# Altium PCB PanelFK02.PcbDoc
Units mil, origin at the board's own origin, x right, y up, seen from the top; angles counter-clockwise.
Board outline 6000 x 4000 mil, 2 copper layers (Top Layer, Bottom Layer); 22 components, 21 nets, 78 pads, 0 vias.
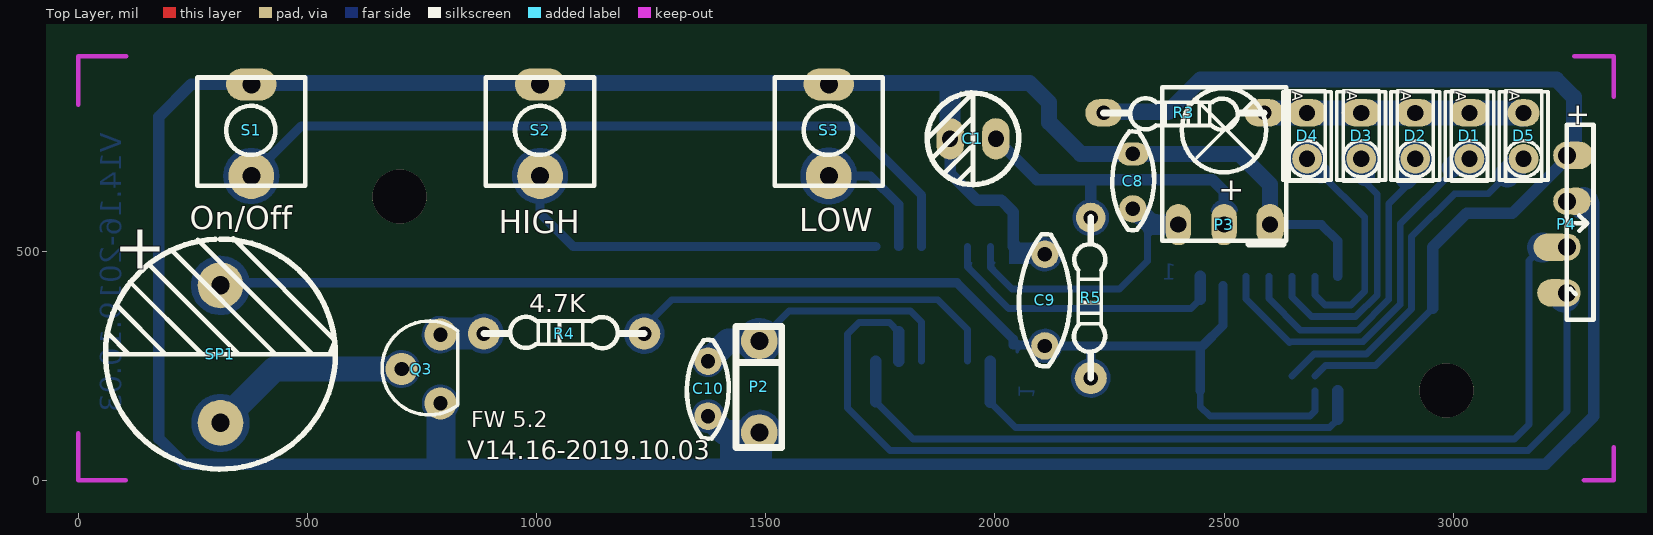
[diagram p0: Top Layer view]
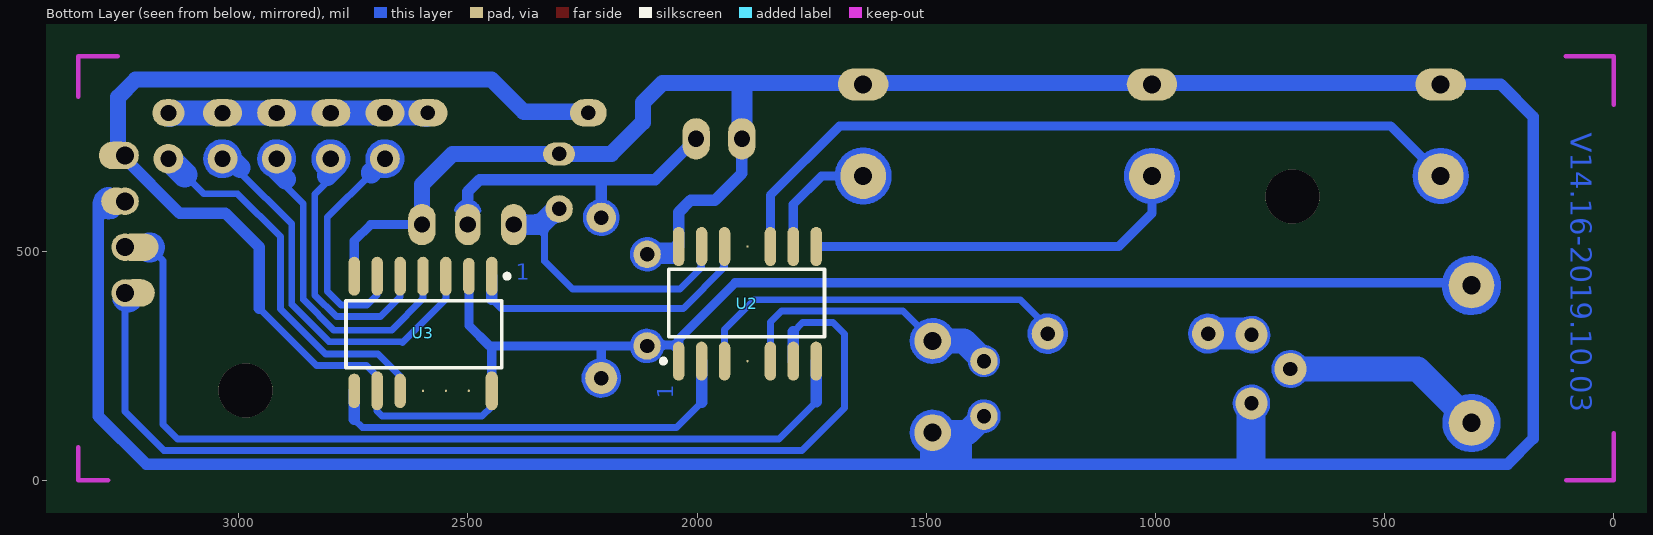
[diagram p1: Bottom Layer view, seen from below]

## Layer stack, top to bottom
Top Solder: solder mask 0.4, Solder Resist, Dk 3.5
Top Layer: signal copper 1.4
Dielectric1: dielectric 12.6, FR-4, Dk 4.8
Bottom Layer: signal copper 1.4
Bottom Solder: solder mask 0.4, Solder Resist, Dk 3.5

## Board outline
-586.82,-718.74 5413.18,-718.74 5413.18,3281.26 -586.82,3281.26

## Design rules (kind name [scope] priority, off if disabled: settings)
Clearance [All] p1: gap=10
FabricationTestPointUsage TestPointUsage [All] p1: valid=0 allowmultiple=FALSE
FabricationTestpoint Testpoint [All] p1: side=3 testpointundercomponent=TRUE minsize=40 maxsize=100 preferedsize=60 minholesize=0 maxholesize=40 preferedholesize=32 testpointgrid=1 allowsidetop=TRUE allowsidebottom=TRUE usegrid=TRUE gridtolerance=0.01
PolygonConnect [All] p1: connectstyle=Relief reliefconductorwidth=10 reliefentries=4 polygonreliefangle="90 Angle" airgapwidth=10
RoutingVias [All] p1: holewidth=28 width=50 viastyle="Through Hole" minholewidth=28 minwidth=50 maxholewidth=28 maxwidth=50
SolderMaskExpansion [All] p1: expansion=4
Width [All] p1: maxlimit=100 minlimit=5 preferedwidth=25 minimp=50.000000 maximp=50.000000 favimp=50.000000
27 further rules are at their usual default settings.

## Classes and differential pairs
component class DDFK: C1 C10 D1 D2 D3 D4 D5 P2 P3 P4 P5 R4 R7 S1 S2 S3 SP1 U2 U3

## Components (designator, comment, footprint, x,y, rotation, side; value= is the part's Value field where it differs from the comment)
C1 "100uF" RB.1/.2 1952,745 r180 top
C8 "100pF" RAD0.12#1 2301,712 r270 top (schematic designator C3)
C9 "100nF" RAD0.2 2109,493 r270 top (schematic designator C3)
C10 "100nF" RAD0.12#2 1374,140 r90 top
D1 "L1" LED0.5Rec#1 3035.12,751.54 r270 top locked
D2 "L2" LED0.5Rec#1 2917.01,751.54 r270 top locked
D3 "L3" LED0.5Rec#1 2798.9,751.54 r270 top locked
D4 "L4" LED0.5Rec#1 2680.79,751.54 r270 top locked
D5 "L5" LED0.5Rec#2 3153.23,751.54 r270 top locked
P2 "Magnet" Magnet 1486,304 r270 top
P3 "IrReceiver" IrRec1 2499.68,763.8 r0 top locked
P4 "Header 4" xH4RALim 3247.72,708.66 r180 top
Q3 "2N3904" TO92BS2 765.4,242.8 r270 top (schematic designator Q2)
R3 "220" RES0.35#1 2237,801.54 r0 top (schematic designator R1)
R4 "4.7K" RES0.35#2 1235,320 r180 top
R5 "10" RES0.35#3 2209,573 r270 top (schematic designator R1)
S1 "On/Off" PUSHBOT2 377.64,763.8 r270 top locked
S2 "HIGH" PUSHBOT2 1007.56,763.8 r270 top locked
S3 "LOW" PUSHBOT2 1637.48,763.8 r270 top locked
SP1 "BUZZER" RB.3/.6 310.39,425.2 r90 top
U2 "ATtiny24A-SSU" SOIC14#1 2040,260 r90 bottom
U3 "MC74HC164AN" SOIC14#2 2447.8,445.28 r270 bottom

## Footprints (in the part's own frame and the unit in brackets; to place one, negate y for a bottom-side part, rotate by r counter-clockwise, add the part's x,y. Pads: shape width x height; smd on the part's side, far side on the other; paste and mask are expansions set on the pad)
IrRec1 [mil] "38KHz Ir Receiver"
  oval 55x90 hole 35.43: 1(-99.65,-205.95) 2(0.35,-205.95)
  oval 60x90 hole 35.43: 3(100.35,-205.95)
  silkscreen extent -135,-249 135,94
LED0.5Rec#1 [mil] "Led 0.5mm Rectangular"
  oval 60x85 hole 35.43: 1(-50,0)
  round 65 hole 35.43: 2(50,0)
  silkscreen extent -98,-53 98,53
LED0.5Rec#2 [mil] "Led 0.5mm Rectangular"
  oval 60x70 hole 35.43: 1(-50,0)
  round 65 hole 35.43: 2(50,0)
  silkscreen extent -98,-53 98,53
Magnet [mil]
  round 80 hole 39.37: 1(0,0) 2(200,0)
  silkscreen extent -31,-51 232,49
PUSHBOT2 [mil] "NO-2pin"
  oval 70x110 hole 39.37: 1(-100,0)
  round 100 hole 39.37: 2(100,0)
  silkscreen extent -115,-118 121,118
RAD0.2 [mil]
  round 60 hole 31.5: 1(0,0) 2(200,0)
  silkscreen extent -44,-57 244,55
RAD0.12#1 [mil]
  oval 50x70 hole 31.5: 1(0,0)
  round 60 hole 31.5: 2(120,0)
  silkscreen extent -49,-45 166,46
RAD0.12#2 [mil]
  round 60 hole 31.5: 1(0,0) 2(120,0)
  silkscreen extent -49,-45 166,46
RB.1/.2 [mil]
  oval 60x90 hole 35.43: 1(-50,0) 2(50,0)
  silkscreen extent -100,-100 100,100
RB.3/.6 [mil]
  round 100 hole 40: 1(0,0) 2(-300,0)
  silkscreen extent -401,-251 102,251
RES0.35#1 [mil] "Diode, Axial; Body 5.2 x 2.7 mm (LxDia. max), Lead Dia. 0.86 mm (max)"
  oval 80x60 hole 31.5: 1(0,0)
  oval 85x60 hole 31.5 paste+0: 2(350,0)
  silkscreen extent 0,-37 350,32
RES0.35#2 [mil] "Diode, Axial; Body 5.2 x 2.7 mm (LxDia. max), Lead Dia. 0.86 mm (max)"
  round 70 hole 31.5: 1(0,0)
  round 70 hole 31.5 paste+0: 2(350,0)
  silkscreen extent 0,-37 350,32
RES0.35#3 [mil] "Diode, Axial; Body 5.2 x 2.7 mm (LxDia. max), Lead Dia. 0.86 mm (max)"
  round 65 hole 31.5: 1(0,0)
  round 70 hole 31.5 paste+0: 2(350,0)
  silkscreen extent 0,-37 350,32
SOIC14#1 [mil] "SOIC, 16-Leads, Body 9.9x3.9mm, Pitch 1.27mm, IPC High Density"
  oval 85x25 smd: 1(0,0) 2(0,-50) 3(0,-100) 5(0,-200) 6(0,-250) 7(0,-300) 8(250.04,-300) 9(250.04,-250) 10(250.04,-200) 12(250.04,-100) 13(250.04,-50) 14(250.04,0)
  round 5 smd: 4(0,-150) 11(250.04,-150)
  silkscreen extent -5,-318 200,38, body extent 16,-318 235,20, height 69
SOIC14#2 [mil] "SOIC, 16-Leads, Body 9.9x3.9mm, Pitch 1.27mm, IPC High Density"
  oval 85x25 smd: 1(0,0) 3(0,-100) 4(0,-150) 5(0,-200) 6(0,-250) 7(0,-300) 9(250.04,-250)
  oval 80x25 smd: 2(0,-50)
  oval 75x25 smd: 8(250.04,-300) 10(250.04,-200)
  round 5 smd: 11(250.04,-150) 12(250.04,-100) 13(250.04,-50)
  oval 85x27 smd: 14(250.04,0)
  silkscreen extent -5,-318 200,38, body extent 16,-318 235,20, height 69
TO92BS2 [mil] "NPN-CC5551,C945 Base Side"
  round 70 hole 31.5: 1(-75,25) 2(0,-60) 3(75,25)
  silkscreen extent -105,-102 100,63
xH4RALim [mil] "100mil between pins"
  round 60 hole 39.37: 1(0,0) 2(0,100) 3(0,200) 4(0,300)
  silkscreen extent -58,-67 0,358

## Part data
C1 C10: library part Cap, "Capacitor SMD"
C8: library part Cap, "Capacitor np"
C9: library part Cap, "Capacitor"
D1 D2 D3 D4 D5: library part LED0.5, "LED Radial 0.5"
P2: library part "Header 6", "Header, 6-Pin"
P3: library part "Header 3", "3pin"
P4: library part "Header 5", "Header, 5-Pin"
Q3: library part BC337, "NPN General Purpose Amplifier"
R3 R4 R5: library part Resistor, "Resistor"
S1 S2 S3: library part SW-PB, "Push Botton"
U2: library part ATtiny24-16PC, "8-Bit AVR Microcontroller with 2K Bytes of Flash Memory"
U3: "8-Bit Serial Input / Parallel-Output Shift Register"

## Free pads (board coordinates)
  round 118.11 hole 118.11: 0(2985,196) 1(701,619)
  oval 90x60 all layers, no hole: 2(3220,508.66)
  oval 80x60 all layers, no hole: 2(3223,408.66) 2(3265,708.66)
  oval 65x60 all layers, no hole: 2(3267.23,608.66)

## Nets (pads, with @x,y where several pads share a name; then routed paths per layer and width w, separated by ;. In a path a pad name is that pad's centre, name@x,y a point inside that pad or via, vN(x,y) a via of type N, cw(c..) or ccw(c..) an arc to the next point about the centre after c; other vN are vias at no path point)
+5V: C9.2 P4.1 pad.2@3265,708.66 R3.1 R5.2 SP1.1 U2.1 U3.2 U3.9 U3.14 | length 5694.8
  Bottom Layer w7: 2067.92,288.63 cw(c2068.43,280.07) 2076.22,283.64
  Bottom Layer w8: 2045.97,309.52 ccw(c2054.54,309.56) 2054,301 ; U2.1@2048.48,281.02 cw(c2057.04,280.48) 2058,289 ; 2069,301 ccw(c2069.96,309.52) 2077.95,306.41
  Bottom Layer w15: U3.14 2447.8,161.2 2468.76,140.24 2687.24,140.24 2697.8,150.8 U3.9 ; U3.9@2697.8,227.28 2720.8,250.28 2830.28,250.28 2955,375
  Bottom Layer w20: SP1.1 SP1.1@316.2,431 ; SP1.1@327.2,442 SP1.1@316.2,431 ; C9.2@2103,293 2207,293 ; C9.2@2103,295 2040,295 2040,308 1917,431 SP1.1@316.2,431 ; R5.2 2209,291 2207,293 ; U3.14 2447.8,293 ; U3.2@2497.8,425.28 2497.8,338 2452.79,293 2207,293 ; 365.2,425.2 ccw(c310.39,425.2) 365.2,425.2 ; C9.2@2136.66,293 ccw(c2109,293) C9.2@2136.66,293 ; R5.2@2241.98,223 ccw(c2209,223) R5.2@2241.98,223
  Bottom Layer w25: 2955,375 2955,509 3028.8,582.8 3128.8,582.8 pad.2@3250.5,704.5
  Bottom Layer w35: R3.1@2237,798 2243,804 2378,804 2448,874 3225,874 3263,836 3263,723.94 P4.1
BUZZER: R4.1 U2.3 | length 1054.9
  Bottom Layer w15: R4.1 1235,334 1295,394 1875,394 1940,329 U2.3
  Bottom Layer w20: R4.1@1269.23,320 ccw(c1235,320) R4.1@1269.23,320
CLK: U2.2 U3.8 | length 940.2
  Bottom Layer w15: 1990,170 2044.76,115.24 2730.24,115.24 2747.8,132.8
  Bottom Layer w25: 1990,170 U2.2 ; 2747.8,132.8 U3.8
DIMOUT: P4.3 pad.2@3220,508.66 U2.7 | length 2048.9
  Bottom Layer w15: 1740,171 1820.76,90.24 3133.24,90.24 3165,122 3165,479 pad.2@3188,502
  Bottom Layer w20: pad.2@3198.12,530.65 ccw(c3194,508) pad.2@3201.87,486.36
  Bottom Layer w25: 1740,171 U2.7 ; pad.2@3237.62,508 pad.2@3247.72,497.91
GND: C1.2 C8.1 C9.1 C10.1 P2.2 P3.3 P4.2 pad.2@3267.23,608.66 Q3.3 S1.1 S2.1 S3.1 U2.14 U3.7 | length 8836.6
  Bottom Layer w5: U2.14@2050,524 ccw(c2057.76,523.23) 2061.36,516.32 ; 3292.16,572.72 cw(c3291.02,567.87) 3296,568
  Bottom Layer w20: P3.3 2712.15,557.85 2747.8,522.2 U3.7 ; pad.2@3271.02,582.22 ccw(c3282.59,604.69) pad.2@3281.82,629.96 ; C10.1@1400.68,140 ccw(c1374,140) C10.1@1400.68,140 ; 1526,104 ccw(c1486,104) 1526,104 ; C9.1@2136.46,493 ccw(c2109,493) C9.1@2136.46,493
  Bottom Layer w25: S1.1 246.8,863.8 176,793 176,91 231.76,35.24 3201.24,35.24 3306,140 3306,581 pad.2@3278.34,608.66 ; 1900,855 1900,867 ; C1.2 1902,670 1961,611 2014,611 2040,585 U2.14 ; Q3.3@818.8,167.8 ccw(c790.4,167.8) Q3.3@818.8,167.8
  Bottom Layer w35: S1.1 380.84,867 1900,867 2075,867 2118,824 2118,781 2187,712 C8.1 2533,712 2600.04,644.96 P3.3 ; pad.2@3267.23,608.66 P4.2 pad.2@3278.34,608.66
  Bottom Layer w45: 1900,855 1902,853 C1.2
  Bottom Layer w55: C10.1 1410,104 P2.2 1486,53
IRSEN: C8.2 P3.1 U2.13 | length 696
  Bottom Layer w5: U2.13@1998.82,475.2 ccw(c2004.83,469.08) 1999.38,462.46 ; C8.2@2302,564 cw(c2302.95,555.48) 2309.31,561.23 ; 2322,549 cw(c2307.76,533.88) 2328.39,536.27 ; 2346.58,580.76 ccw(c2352.94,586.51) 2353.89,577.99
  Bottom Layer w8: 2336.49,532.06 cw(c2345,531) 2343.94,539.51 ; 2368.48,576.02 ccw(c2369.44,584.54) P3.1@2378,584 ; 2370.26,539.34 cw(c2369.72,530.78) P3.1@2378,533
  Bottom Layer w15: U2.13 1990,464 2037,417 2272,417 2333,478 2333,550 ; C8.2@2305,592 C8.2@2307,592
  Bottom Layer w45: C8.2@2307,592 2341.15,557.85 P3.1
KEY1: S1.2 U2.10 | length 2005.1
  Bottom Layer w20: S1.2 486.84,773 1689,773 1840,622 U2.10 ; 429.05,663.8 ccw(c377.64,663.8) 429.05,663.8
KEY2: S2.2 U2.8 | length 1166.3
  Bottom Layer w20: S2.2 1007.56,582.44 1080,510 U2.8@1740,510 ; 1058.88,663.8 ccw(c1007.56,663.8) 1058.88,663.8
KEY3: S3.2 U2.9 | length 598.1
  Bottom Layer w20: S3.2 1728.2,663.8 1790,602 U2.9 ; 1689.69,663.8 ccw(c1637.48,663.8) 1689.69,663.8
MAGNET: C10.2 P2.1 U2.5 | length 1015.3
  Bottom Layer w15: P2.1 1551,369 1816,369 1840,345 U2.5
  Bottom Layer w20: C10.2@1399.08,260 ccw(c1374,260) C10.2@1399.08,260 ; 1526.05,304 ccw(c1486,304) 1526.05,304
  Bottom Layer w55: C10.2 1418,304 P2.1
NetD1_1: D1.1 D2.1 D3.1 D4.1 D5.1 R3.2 | length 574.2
  Bottom Layer w55: R3.2@2590.53,798 R3.2 3146.16,801.54 3149.69,798 D5.1
NetD1_2: D1.2 U3.3 | length 1039.9
  Bottom Layer w15: U3.3 2547.8,395.28 2642.8,300.28 2644.8,302.28 2802.49,302.28 2884,383.78 2884,558.78 2996.5,671.28 2996.5,681.5
  Bottom Layer w25: D1.2@3065.12,701.54 ccw(c3035.12,701.54) D1.2@3065.12,701.54
  Bottom Layer w45: 2996.5,681.5 3016.54,701.54 D1.2
NetD2_2: D2.2 U3.4 | length 873.1
  Bottom Layer w15: U3.4 2597.8,396.28 2666.8,327.28 2792.14,327.28 2859,394.14 2859,603 2898,642
  Bottom Layer w25: D2.2@2947.01,701.54 ccw(c2917.01,701.54) D2.2@2947.01,701.54
  Bottom Layer w45: 2897,657 D2.2@2935.27,695.27
NetD3_2: D3.2 U3.5 | length 810.6
  Bottom Layer w15: U3.5 2647.8,400.2 2690.72,357.28 2786.78,357.28 2834,404.49 2834,624 2807.5,650.5 2807.5,665.5 ; D3.2@2804.9,707.54 D3.2@2815.72,696.72 ; 2805,649 2818.5,662.5
  Bottom Layer w25: D3.2@2828.9,701.54 ccw(c2798.9,701.54) D3.2@2828.9,701.54
  Bottom Layer w45: D3.2@2787.4,684.6 2807,665 ; D3.2@2798.9,682.1 D3.2
NetD4_2: D4.2 U3.6 | length 701.2
  Bottom Layer w15: U3.6 2697.8,404.28 2719.8,382.28 2776.43,382.28 2806.72,412.57 2806.72,573.28 2710.5,669.5
  Bottom Layer w25: D4.2@2710.79,701.54 ccw(c2680.79,701.54) D4.2@2710.79,701.54
  Bottom Layer w45: D4.2 2710.5,671.82 2710.5,669.5
NetD5_2: D5.2 U3.10 | length 794.8
  Bottom Layer w15: U3.10@2647.8,227.28 2695.8,275.28 2810.85,275.28 2909,373.43 2909,532 3002,625 3076,625 3117.5,666.5
  Bottom Layer w55: 3117.5,666.5 3152.54,701.54 D5.2
NetQ2_1: Q3.1 R4.2 | length 320.3
  Bottom Layer w25: Q3.1@810.58,337.98 ccw(c790.4,317.8) Q3.1@818.94,317.8
  Bottom Layer w35: R4.2@911,320 ccw(c885,320) R4.2@911,320
NetQ2_2: Q3.2 SP1.2 | length 977.9
  Bottom Layer w20: 364.03,125.2 ccw(c310.39,125.2) 364.03,125.2 ; Q3.2@736.79,242.8 ccw(c705.4,242.8) Q3.2@736.79,242.8
  Bottom Layer w55: SP1.2 427.99,242.8 Q3.2
SERDATA: U2.12 U3.1 | length 658.2
  Bottom Layer w5: U2.12@1948,474 ccw(c1955.36,469.6) 1948.09,465.06
  Bottom Layer w15: U2.12 1940,465 2030,375 2428,375 2447.8,394.8
  Bottom Layer w25: 2447.8,394.8 U3.1
VMIC: C1.1 P3.2 R5.1 | length 958.6
  Bottom Layer w10: 2475.45,588.15 cw(c2500.51,582.51) 2525.23,589.47
  Bottom Layer w20: R5.1@2239.15,573 ccw(c2209,573) R5.1@2239.15,573
  Bottom Layer w25: C1.1 2091,656 2210,656 ; R5.1 2209,655 2210,656 ; P3.2 2500.04,629.96 2474,656 2210,656
ZEROC: P4.4 pad.2@3223,408.66 U2.6 | length 2308.4
  Bottom Layer w15: 1790,324 1770,344 1703,344 1678,319 1678,158 1770.76,65.24 3163.24,65.24 3247.72,149.72 P4.4
  Bottom Layer w20: pad.2@3225,383 ccw(c3242.03,400.14) P4.4@3265.42,394.08
  Bottom Layer w25: U2.6 1790,324
pads on no net: U2.4 U2.11 U3.11 U3.12 U3.13

## Keep-outs
Keep-Out Layer:
  lines w10: 0,103 0,0 104,0 ; 0,819 0,925.2 105,925.2 ; 3264,925.2 3350,925.2 3350,837 ; 3285,0 3350,0 3350,72

## Other copper
Bottom Layer:
  rectangle net NetQ2_1: 778.4,285 885,355
  rectangle net GND: 2031,472 2119,519
  rectangle net GND: 760,39 823,158
  rectangle net GND: 1400,36 1486,87
  region net GND: 3318,608 3318,570 3317,570 3306,581
  text "V14.16-2019.10.03" at 109,758 h78.74 r90
  text "1" at 2396,425 h60
  text "1" at 2040,178 h60 r270

## Silkscreen, mask and mechanical layers (free items; w line width, h text height)
Top Overlay:
  circle w10: c2499.68,763.8 r92.01
  lines w8: 2439,831 2564,706 ; 2441,705 2566,830
  text "+" at 3236,824 h80 r270
  text "+" at 2487,611 h50
  text "+" at 78,461 h100
  text "FW 5.2" at 858,104 h60
  text "V14.16-2019.10.03" at 849,32 h70

## Text inside footprints (layer, text, board x,y; h text height)
D1: Top Overlay "A" at 2998,848 h39.37 r270
D2: Top Overlay "A" at 2877.64,848.78 h39.37 r270
D3: Top Overlay "A" at 2759.53,848.78 h39.37 r270
D4: Top Overlay "A" at 2641.42,848.78 h39.37 r270
D5: Top Overlay "A" at 3113.86,848.78 h39.37 r270